# EAGLE board CT_schematic (EAGLE 7.6.0)

Size 100 x 80 mm. Coordinates in mm from the lower left corner, seen from the top.
Outline: 0,0 100,0 100,80 0,80 0,0
Copper layers (1*16): Top 0.035mm / dielectric 1.5mm / Bottom 0.035mm
Design rules "default": minimum track width 10mil, minimum drill 24mil, track to track 8mil, track to pad 8mil, pad to pad 8mil, via to via 8mil, smd to smd 8mil, copper to edge 40mil, drill to drill 8mil, minimum pad ring 10mil, minimum via ring 8mil, stop-mask expansion 4mil, vias tented up to drill 0mil, thermal gap 10mil

## Footprints (pad centres in the part's own frame; a part is rotated, then mirrored left to right if it is on the bottom)
C0603 = smd 0.8 x 0.8: 1 -0.762,0; 2 0.762,0
C0402 = smd 0.5 x 0.5: 1 -0.508,0; 2 0.508,0
C1210 = smd 1.2 x 2.5: 1 -1.524,0; 2 1.524,0
R0603 = smd 0.8 x 0.8: 1 -0.762,0; 2 0.762,0
EXV-9H = smd 3.505 x 1.676: 1 -2.857,0; 2 2.857,0
L1210 = smd 1.2 x 2.5: 1 -1.524,0; 2 1.524,0
PJ-037B_PACKAGE = drill 3.7 square: 1 12,0 | drill 3.2 square: 2 6,0
UFBGA64 = smd 0.2 x 0.2: A1 -1.75,1.75; A2 -1.25,1.75; A3 -0.75,1.75; A4 -0.25,1.75; A5 0.25,1.75; A6 0.75,1.75; A7 1.25,1.75; A8 1.75,1.75; B1 -1.75,1.25; B2 -1.25,1.25; B3 -0.75,1.25; B4 -0.25,1.25; B5 0.25,1.25; B6 0.75,1.25; B7 1.25,1.25; B8 1.75,1.25; C1 -1.75,0.75; C2 -1.25,0.75; C3 -0.75,0.75; C4 -0.25,0.75; C5 0.25,0.75; C6 0.75,0.75; C7 1.25,0.75; C8 1.75,0.75; D1 -1.75,0.25; D2 -1.25,0.25; D3 -0.75,0.25; D4 -0.25,0.25; D5 0.25,0.25; D6 0.75,0.25; D7 1.25,0.25; D8 1.75,0.25; E1 -1.75,-0.25; E2 -1.25,-0.25; E3 -0.75,-0.25; E4 -0.25,-0.25; E5 0.25,-0.25; E6 0.75,-0.25; E7 1.25,-0.25; E8 1.75,-0.25; F1 -1.75,-0.75; F2 -1.25,-0.75; F3 -0.75,-0.75; F4 -0.25,-0.75; F5 0.25,-0.75; F6 0.75,-0.75; F7 1.25,-0.75; F8 1.75,-0.75; G1 -1.75,-1.25; G2 -1.25,-1.25; G3 -0.75,-1.25; G4 -0.25,-1.25; G5 0.25,-1.25; G6 0.75,-1.25; G7 1.25,-1.25; G8 1.75,-1.25; H1 -1.75,-1.75; H2 -1.25,-1.75; H3 -0.75,-1.75; H4 -0.25,-1.75; H5 0.25,-1.75; H6 0.75,-1.75; H7 1.25,-1.75; H8 1.75,-1.75
SAMTEC_FTSH-105-01-L-DV-K = smd 0.762 x 2.794: 1 -2.54,-2.032; 2 -2.54,2.032; 3 -1.27,-2.032; 4 -1.27,2.032; 5 0,-2.032; 6 0,2.032; 7 1.27,-2.032; 8 1.27,2.032; 9 2.54,-2.032; 10 2.54,2.032
SSOP-16 = smd 1.981 x 0.356: 1 -2.464,2.223; 2 -2.464,1.587; 3 -2.464,0.953; 4 -2.464,0.318; 5 -2.464,-0.318; 6 -2.464,-0.953; 7 -2.464,-1.587; 8 -2.464,-2.223; 9 2.464,-2.223; 10 2.464,-1.587; 11 2.464,-0.953; 12 2.464,-0.318; 13 2.464,0.318; 14 2.464,0.953; 15 2.464,1.587; 16 2.464,2.223
182-009-MALE = drill 1.194 pad 1.524 octagon: 1 -5.537,10.923; 2 -2.769,10.923; 3 0,10.923; 4 2.769,10.923; 5 5.537,10.923; 6 -4.153,8.08; 7 -1.384,8.08; 8 1.384,8.08; 9 4.153,8.08 | hole 3.048: -12.446,9.501; 12.446,9.501
SOIC-8 = smd 1.6 x 0.6: 1 -2.7,1.905 | smd 1.55 x 0.6: 2 -2.7,0.635; 3 -2.7,-0.635; 4 -2.7,-1.905; 5 2.7,-1.905; 6 2.7,-0.635; 7 2.7,0.635; 8 2.7,1.905
ABLS-25.000MHZ-B2F-T = smd 5.6 x 2.8: 1 -3.81,0; 2 5.69,0
ASEK = smd 1.4 x 1: 1 -1.1,-0.8; 2 1.1,-0.8; 3 1.1,0.8; 4 -1.1,0.8
SOIC-8_EP = smd 1.6 x 0.533: 1 -2.921,1.905; 2 -2.921,0.635; 3 -2.921,-0.635; 4 -2.921,-1.905; 5 2.921,-1.905; 6 2.921,-0.635; 7 2.921,0.635; 8 2.921,1.905 | smd 2.54 x 3.302: EPAD 0,0 | drill 0.406 pad 0.406: P$1 -0.508,0.635; P$2 0.381,0.635; P$3 -0.508,-0.635; P$4 0.381,-0.635
WSON-8 = smd 0.3 x 0.6: 1 -0.75,0; 2 0.05,0; 3 0.85,0; 4 1.65,0; 5 1.65,3.8; 6 0.85,3.8; 7 0.05,3.8; 8 -0.75,3.8 | smd 3 x 2.6: PAD 0.45,1.9
SON-6 = smd 0.55 x 0.3: 1 -0.355,0.5 | smd 0.52 x 0.3: 2 -0.37,0; 3 -0.37,-0.5; 4 0.37,-0.5; 5 0.37,0; 6 0.37,0.5
SW_4-1437565-2 = smd 1.4 x 2.1: 1 -2.23,4.55; 2 -2.23,-4.55; 3 2.23,4.55; 4 2.23,-4.55
LGM67K-G1J2-24-Z = smd 0.8 x 1.4: A -2,0; C 0,0
NC7SZ125M5X = smd 1.3 x 0.7: 1 -1.3,0.95; 2 -1.3,0; 3 -1.3,-0.95; 4 1.3,-0.95; 5 1.3,0.95

## Placement (x,y rotation side)
C1  1e-06  [C0603]  -57.15,83.82 0 top  (outside the outline)
C2  1e-07  [C0603]  -60.96,83.82 0 top  (outside the outline)
C3  1e-07  [C0603]  -64.77,83.82 0 top  (outside the outline)
C4  1e-07  [C0603]  -68.58,83.82 0 top  (outside the outline)
C5  1e-07  [C0603]  -72.39,83.82 0 top  (outside the outline)
C6  1e-07  [C0603]  -76.2,83.82 0 top  (outside the outline)
C7  4.7e-06  [C0603]  -49.53,83.82 0 top  (outside the outline)
C8  1e-08  [C0603]  -80.01,83.82 0 top  (outside the outline)
C9  1e-06  [C0603]  -15.24,88.9 0 top  (outside the outline)
C10  1e-07  [C0603]  -19.05,88.9 0 top  (outside the outline)
C11  1e-11  [C0402]  -72.39,88.9 0 top  (outside the outline)
C12  1e-11  [C0402]  -76.2,88.9 0 top  (outside the outline)
C13  1e-07  [C0402]  -80.01,88.9 0 top  (outside the outline)
C14  1e-06  [C0603]  -22.86,88.9 0 top  (outside the outline)
C15  1e-06  [C0603]  -26.67,88.9 0 top  (outside the outline)
C16  2.2e-07  [C0603]  -53.34,83.82 0 top  (outside the outline)
C17  1e-06  [C0603]  -30.48,88.9 0 top  (outside the outline)
C18  1e-06  [C0603]  -34.29,88.9 0 top  (outside the outline)
C19  1e-06  [C0603]  -38.1,88.9 0 top  (outside the outline)
C20  1e-06  [C0603]  -41.91,88.9 0 top  (outside the outline)
C21  1e-08  [C0402]  -15.24,93.98 0 top  (outside the outline)
C22  1e-05  [C1210]  -68.58,71.12 0 top  (outside the outline)
C23  1e-05  [C1210]  -74.93,71.12 0 top  (outside the outline)
C24  1e-05  [C1210]  -81.28,71.12 0 top  (outside the outline)
C25  1e-05  [C1210]  -16.51,78.74 0 top  (outside the outline)
C26  8e-07  [R0603]  -45.72,88.9 0 top  (outside the outline)
C27  1e-05  [C1210]  -22.86,78.74 0 top  (outside the outline)
C28  1e-07  [C0402]  -19.05,93.98 0 top  (outside the outline)
C29  0.0001  [EXV-9H]  -71.12,62.23 0 top  (outside the outline)
C30  0.0001  [EXV-9H]  -17.78,71.12 0 top  (outside the outline)
C31  1e-08  [C0402]  -22.86,93.98 0 top  (outside the outline)
C32  1e-08  [C0402]  -26.67,93.98 0 top  (outside the outline)
I1  1e-05  [L1210]  -29.21,78.74 0 top  (outside the outline)
J1  PJ-037B  [PJ-037B_PACKAGE]  -27.94,50.8 0 top  (outside the outline)
R2  1000.0  [R0603]  -49.53,88.9 0 top  (outside the outline)
R4  4700.0  [R0603]  -53.34,88.9 0 top  (outside the outline)
R5  10000.0  [R0603]  -15.24,83.82 0 top  (outside the outline)
R6  10000.0  [R0603]  -20.32,83.82 0 top  (outside the outline)
R7  10000.0  [R0603]  -25.4,83.82 0 top  (outside the outline)
R8  10000.0  [R0603]  -30.48,83.82 0 top  (outside the outline)
R9  10000.0  [R0603]  -35.56,83.82 0 top  (outside the outline)
R10  5.0  [R0603]  -57.15,88.9 0 top  (outside the outline)
R11  100000.0  [R0603]  -55.88,77.47 0 top  (outside the outline)
R12  120.0  [R0603]  -60.96,88.9 0 top  (outside the outline)
R13  4031.5447154472  [R0603]  -50.8,77.47 0 top  (outside the outline)
R14  2200.0  [R0603]  -64.77,88.9 0 top  (outside the outline)
R15  100000.0  [R0603]  -60.96,77.47 0 top  (outside the outline)
R16  300000.0  [R0603]  -66.04,77.47 0 top  (outside the outline)
R17  100000.0  [R0603]  -71.12,77.47 0 top  (outside the outline)
R18  10000.0  [R0603]  -40.64,83.82 0 top  (outside the outline)
R19  10000.0  [R0603]  -45.72,83.82 0 top  (outside the outline)
R20  9100.0  [R0603]  -68.58,88.9 0 top  (outside the outline)
R21  680000.0  [R0603]  -76.2,77.47 0 top  (outside the outline)
R22  120000.0  [R0603]  -81.28,77.47 0 top  (outside the outline)
U1  STM32L433RBI6  [UFBGA64]  -24.13,62.23 0 top  (outside the outline)
U2  FTSH-105-01-L-DV-K  [SAMTEC_FTSH-105-01-L-DV-K]  -76.2,30.48 0 top  (outside the outline)
U3  LTC2804CGN-1#PBF  [SSOP-16]  -64.77,49.53 0 top  (outside the outline)
U4  182-009-113R531  [182-009-MALE]  -36.83,6.35 0 top  (outside the outline)
U5  MCP2562-E/SN  [SOIC-8]  -77.47,49.53 0 top  (outside the outline)
U6  182-009-113R531  [182-009-MALE]  -36.83,27.94 0 top  (outside the outline)
U7  ABLS-25.000MHZ-B2F-T  [ABLS-25.000MHZ-B2F-T]  -36.83,71.12 0 top  (outside the outline)
U8  ASEK-32.768KHz-ECST  [ASEK]  -62.23,62.23 0 top  (outside the outline)
U9  MIC5234YME  [SOIC-8_EP]  -48.26,69.85 0 top  (outside the outline)
U10  LP2951ACSDX/NOPB  [WSON-8]  -43.18,60.96 0 top  (outside the outline)
U11  TPS3895ADRYR  [SON-6]  -29.21,92.71 0 top  (outside the outline)
U12  4-1437565-2  [SW_4-1437565-2]  -44.45,49.53 0 top  (outside the outline)
U13  Q65110A2395  [LGM67K-G1J2-24-Z]  -57.15,71.12 0 top  (outside the outline)
U14  nc7sz125m5x  [NC7SZ125M5X]  -34.29,77.47 0 top  (outside the outline)
U15  nc7sz125m5x  [NC7SZ125M5X]  -40.64,77.47 0 top  (outside the outline)

## Library data of the parts
C1-C32 I1 J1 R2 R4-R22 U1-U15 = circuit_tree

## Nets
CLK_CRYSTAL_U1_C1: C11.1 U1.C1 U7.1
CLK_CRYSTAL_U1_D1: C12.1 U1.D1 U7.2
CLK_U1_A1: U1.A1 U8.3
GND: C1.2 C2.2 C3.2 C4.2 C5.2 C6.2 C7.2 C8.2 C9.2 C10.2 C11.2 C12.2 C13.2 C14.2 C15.2 C17.2 C18.2 C19.2 C20.2 C21.2 C22.2 C23.2 C24.2 C25.2 C26.2 C27.2 C28.2 C29.2 C30.2 C31.2 C32.2 J1.2 R2.2 R5.2 R9.2 R10.2 R14.2 R17.2 R20.2 R22.2 U1.C2 U1.D4 U1.D5 U1.D6 U1.F1 U2.3 U2.5 U3.8 U4.5 U5.2 U5.8 U6.5 U8.2 U9.7 U9.EPAD U10.3 U10.4 U10.PAD U11.2 U13.C U14.2 U14.3 U15.1 U15.3
NET_U1_B4: R5.1 U1.B4
NET_U1_E1: R4.1 U1.E1 U15.4
NET_U1_H7: U13.A
NET_U1_H8: U12.3 U12.4
NET_U2_9: R10.1 U2.9
NET_U3_6: C14.1 U3.6
NET_U3_7: C16.1 I1.2 U3.7
NET_U3_9: C15.1 U3.9
NET_U3_10: C16.2 U3.10
NET_U3_11: R11.1 U3.11
NET_U4_2: U3.1 U4.2
NET_U4_3: U3.3 U4.3
NET_U4_7: U3.2 U4.7
NET_U4_8: U3.4 U4.8
NET_U5_6: R12.2 U5.6
NET_U6_2: R12.2 U5.6 U6.2
NET_U6_3: R12.1 U5.7 U6.3
NET_U9_4: R13.2 R14.1 U9.4
NET_U10_5: R15.1 U10.5
NET_U10_7: R16.2 R17.1 U10.7
NET_U11_1: R19.1 R20.1 U11.1
NET_U11_3: R21.2 R22.1 U11.3
NET_U11_4: R18.1 U11.4 U14.4 U15.2
NET_U12_1: R2.1 U12.1 U12.2
PROC_CAN1_RX: U1.B3 U5.4
PROC_CAN1_TX: U1.A3 U5.1
PROC_LPUART1_CTS: U1.G4 U3.13
PROC_LPUART1_RTS: U1.G5 U3.15
PROC_LPUART1_RX: U1.E3 U3.16
PROC_LPUART1_TX: U1.E2 U3.14
PROC_SYS_JTCK_SWCLK: R9.1 U1.A7 U2.4
PROC_SYS_JTDI: R7.1 U1.A6 U2.8
PROC_SYS_JTDO_SWO: U1.A5 U2.6
PROC_SYS_JTMS_SWDIO: R8.1 U1.A8 U2.2
RST_OUT_U2_JTAG_RST_B: R6.1 U2.10 U14.1
VCC_S1_15V2: C22.1 C23.1 C26.1 C29.1 C30.1 J1.1 U9.5 U9.8 U10.8
VCC_TIER1_3V3: C1.1 C2.1 C3.1 C4.1 C5.1 C6.1 C7.1 C8.1 C9.1 C10.1 C13.1 C17.1 C18.1 C20.1 C21.1 C24.1 C25.1 C28.1 C31.1 C32.1 I1.1 R4.2 R6.2 R7.2 R8.2 R11.2 R13.1 R18.2 R19.2 R21.1 U1.B2 U1.D2 U1.E4 U1.E5 U1.E6 U1.H1 U2.1 U3.5 U3.12 U5.5 U8.4 U9.1 U11.6 U14.5 U15.5
VCC_TIER1_5V0: C19.1 C27.1 R15.2 R16.1 U5.3 U10.1

## Tracks (layer width: path | path; a pad name or v marks a point on that pad's centre or on a via)
CLK_CRYSTAL_U1_C1  (2 unrouted)
CLK_CRYSTAL_U1_D1  (2 unrouted)
CLK_U1_A1  (1 unrouted)
GND  (63 unrouted)
NET_U1_B4  (1 unrouted)
NET_U1_E1  (2 unrouted)
NET_U1_H8  (1 unrouted)
NET_U2_9  (1 unrouted)
NET_U3_6  (1 unrouted)
NET_U3_7  (2 unrouted)
NET_U3_9  (1 unrouted)
NET_U3_10  (1 unrouted)
NET_U3_11  (1 unrouted)
NET_U4_2  (1 unrouted)
NET_U4_3  (1 unrouted)
NET_U4_7  (1 unrouted)
NET_U4_8  (1 unrouted)
NET_U5_6  (1 unrouted)
NET_U6_2  (2 unrouted)
NET_U6_3  (2 unrouted)
NET_U9_4  (2 unrouted)
NET_U10_5  (1 unrouted)
NET_U10_7  (2 unrouted)
NET_U11_1  (2 unrouted)
NET_U11_3  (2 unrouted)
NET_U11_4  (3 unrouted)
NET_U12_1  (2 unrouted)
PROC_CAN1_RX  (1 unrouted)
PROC_CAN1_TX  (1 unrouted)
PROC_LPUART1_CTS  (1 unrouted)
PROC_LPUART1_RTS  (1 unrouted)
PROC_LPUART1_RX  (1 unrouted)
PROC_LPUART1_TX  (1 unrouted)
PROC_SYS_JTCK_SWCLK  (2 unrouted)
PROC_SYS_JTDI  (2 unrouted)
PROC_SYS_JTDO_SWO  (1 unrouted)
PROC_SYS_JTMS_SWDIO  (2 unrouted)
RST_OUT_U2_JTAG_RST_B  (2 unrouted)
VCC_S1_15V2  (8 unrouted)
VCC_TIER1_3V3  (44 unrouted)
VCC_TIER1_5V0  (5 unrouted)